# Altium PCB qav90.PcbDoc (part 2 of 3)
Units mm, origin at the board's own origin, x right, y up, seen from the top; angles counter-clockwise.
Board outline 90 x 90 mm, 3 copper layers (Top Layer, Mid-Layer 1, Bottom Layer); 94 components, 77 nets, 335 pads, 152 vias.
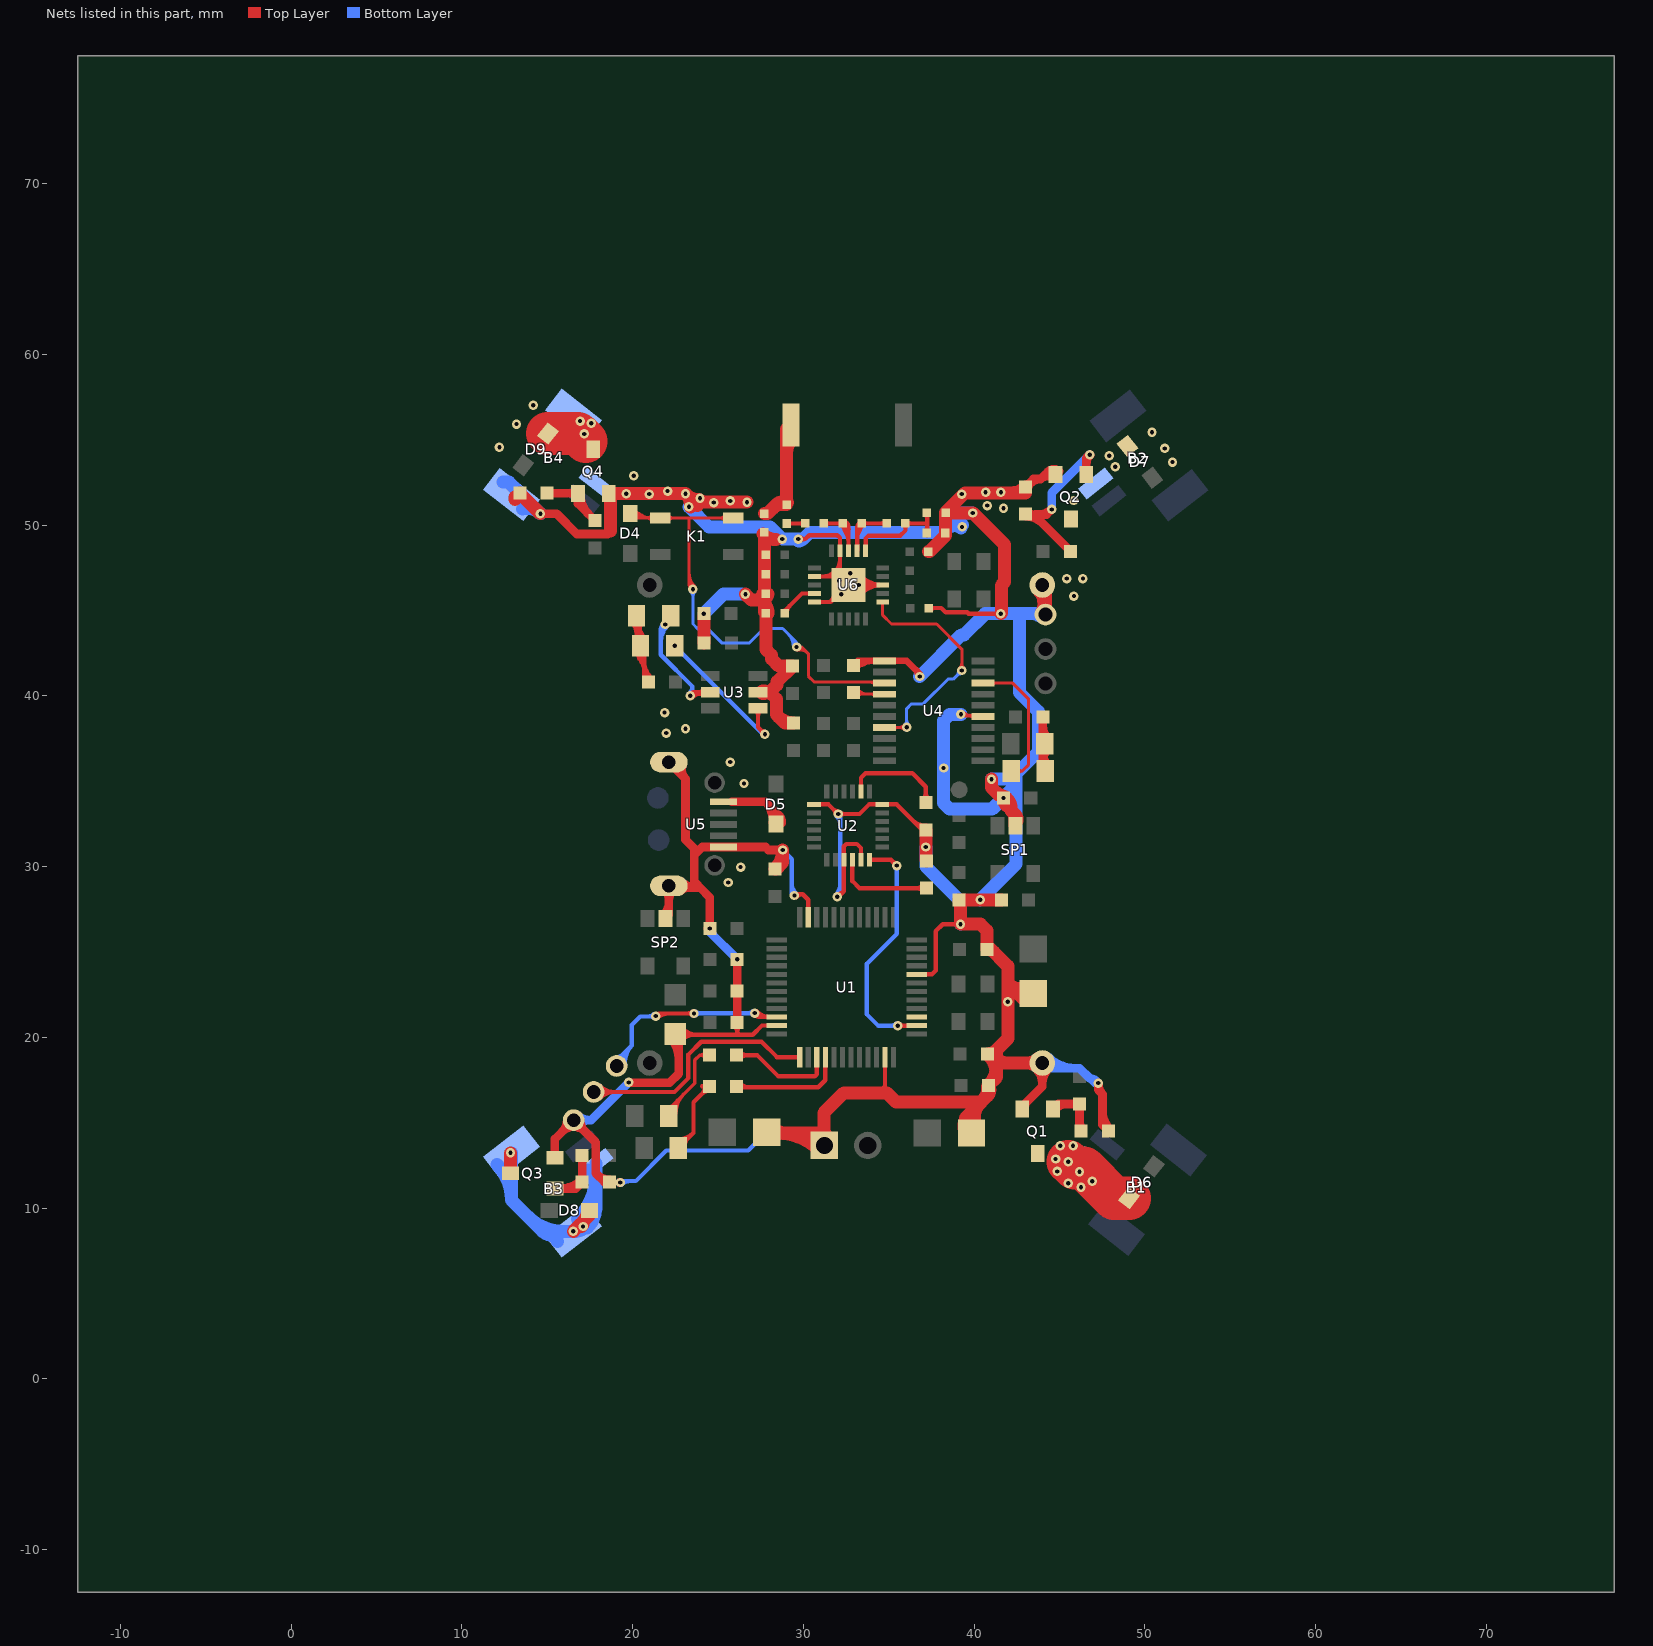
[diagram p2: the nets of this part, all layers, seen from the top]

## Via types
v1: diameter 0.55, hole 0.25, Top Layer to Bottom Layer, tented both sides, 152 vias

## Nets (pads, with @x,y where several pads share a name; then routed paths per layer and width w, separated by ;. In a path a pad name is that pad's centre, name@x,y a point inside that pad or via, vN(x,y) a via of type N, cw(c..) or ccw(c..) an arc to the next point about the centre after c; other vN are vias at no path point) (continued)
GND: B4.0@12.907,51.797 C1.1 C2.2 C3.1 C7.2 C8.1 C9.1 C10.2 C11.1 C12.2 C15.1 C16.1 C18.1 C19.2 C20.1 C22.1 C23.1 C24.1 C25.1 C26.1 C27.1 C28.1 C29.1 C130.2 C131.2 C132.2 C133.2 P1.1 pad.1 pad.2 Q1.2 Q2.2 Q3.2 Q4.2 R3.2 R5.1 R8.1 R17.2 R18.2 R19.1 R20.1 R21.1 R301.2 SP1.2 SP2.2 t4.1 t400.1 U1.8 U1.23 U1.35 U1.47 U2.1 U2.9 U2.11 U2.18 U3.2 U4.1 U4.15 U5.0@22.125,28.875 U5.0@22.125,36.125 U5.5 U6.0 U6.8 U6.14 U6.17 U6.20 | length 418.6
  Top Layer w0.178: v1(39.232,38.927) 39.334,38.826 40.488,38.826 U4.15@40.512,38.802 ; 39.764,38.869 ccw(c39.838,39.145) U4.15@39.981,38.898 ; 39.788,38.863 cw(c39.723,38.621) U4.15@39.941,38.746 ; v1@39.238,38.933 ccw(c39.498,39.193) 39.498,38.826 cw(c39.498,39.193) v1@39.238,38.933 ; v1@39.364,39.059 ccw(c39.927,39.622) 39.927,38.826 cw(c39.927,39.622) v1@39.364,39.059 ; 39.71,38.826 cw(c39.71,38.475) 39.958,38.723 ccw(c39.71,38.475) 39.71,38.826 ; 39.827,38.826 ccw(c39.827,39.011) 39.958,38.88 cw(c39.827,39.011) 39.827,38.826
  Top Layer w0.254: C131.2@22.5,20.2 22.543,20.157 22.697,20.157 27.04,20.157 27.579,20.696 U1.35@28.438,20.696 ; C131.2@22.68,20.38 ccw(c23.218,20.918) 23.218,20.157 ; C131.2@22.859,19.841 cw(c23.622,19.078) 23.622,20.157 ; C131.2@22.859,20.559 ccw(c23.831,21.531) 23.831,20.157 ; 23.85,28.875 23.95,28.775 ; C19.2@25.958,20.677 cw(c25.631,20.306) 26.126,20.306 ; C19.2@26.126,20.868 26.126,20.306 ; 26.2,20.232 26.126,20.306 ; C19.2@26.293,20.677 ccw(c26.62,20.306) 26.126,20.306 ; v1@29.592,28.215 cw(c29.961,27.903) 29.961,28.386 ; v1@29.682,28.386 29.961,28.386 ; v1(29.707,49.189) 30.114,49.189 30.342,49.418 31.993,49.418 32.15,49.261 U6.14@32.15,48.5 32.15,47 U6.0@32.65,46.5 U6.8@34.65,46.5 ; U1.23@30.288,27.046 30.288,28.059 29.961,28.386 ; U2.1@30.625,33.65 31.479,33.65 v1(32.044,33.085) 33.289,33.085 33.853,33.65 35.467,33.65 36.971,32.146 C2.2@37.175,32.146 ; U6.20@30.65,45.5 31.581,45.5 ; U6.17@30.65,47 U6.0@31.993,47 ; 31.134,47 ccw(c31.134,48.067) 31.889,47.312 ccw(c31.257,47.944) 32.15,47.944 ; v1@31.896,33.085 ccw(c31.539,33.085) 31.791,33.338 ccw(c32.044,33.591) v1@32.044,33.233 ; v1@31.993,28.382 ccw(c31.993,28.862) 32.333,28.523 ; U6.0@31.993,45.912 31.581,45.5 ; v1@32.019,28.209 32.375,28.565 32.375,31.191 32.517,31.333 33.136,31.333 33.375,31.094 U2.11@33.375,30.4 ; v1@32.149,32.981 cw(c32.401,32.728) 32.401,33.085 cw(c32.401,33.443) v1@32.149,33.19 ; U6.0@33.104,46.079 cw(c34.068,45.185) 34.068,46.5 cw(c34.068,47.815) U6.0@33.104,46.921 ; U6.0@33.29,45.906 cw(c34.65,44.646) U6.8@34.65,46.5 ; U6.0@33.29,47.094 ccw(c34.65,48.354) U6.8@34.65,46.5 ; 34.635,17.007 34.788,17.161 U1.47@34.788,18.846 ; 36.394,32.723 ccw(c37.175,33.504) C2.2@37.175,32.4 ; U1.8@36.638,23.696 37.539,23.696 37.759,23.916 37.759,26.227 38.165,26.634 v1(39.207,26.634) ; C29.1@37.353,45.15 38.085,45.15 38.334,44.901 39.596,44.901 39.677,44.82 v1(41.569,44.82) ; C29.1@37.44,45.063 cw(c37.65,44.853) 37.65,45.15 cw(c37.65,45.447) C29.1@37.44,45.237 ; 30.065,49.189 cw(c30.065,49.546) 29.812,49.294 ccw(c30.065,49.546) 30.065,49.189 ; 30.065,49.189 ccw(c30.065,48.832) 29.812,49.084 cw(c30.065,48.832) 30.065,49.189 ; 31.581,45.5 cw(c32.11,44.97) 32.36,45.677 ccw(c32.11,44.97) 31.581,45.5 ; 31.581,45.5 ccw(c30.988,46.092) 31.802,46.292 cw(c30.988,46.092) 31.581,45.5 ; 38.85,26.634 cw(c38.85,26.276) 39.102,26.529 ccw(c38.85,26.276) 38.85,26.634 ; 38.85,26.634 ccw(c38.85,26.991) 39.102,26.738 cw(c38.85,26.991) 38.85,26.634 ; 41.212,44.82 cw(c41.212,44.463) 41.464,44.716 ccw(c41.212,44.463) 41.212,44.82 ; 41.212,44.82 ccw(c41.212,45.177) 41.464,44.925 cw(c41.212,45.177) 41.212,44.82 ; U6.0@31.866,45.785 cw(c32.259,45.392) 32.444,45.916 ccw(c32.259,45.392) U6.0@31.866,45.785 ; U6.0@31.9,45.819 ccw(c31.501,46.218) 32.049,46.353 cw(c31.501,46.218) U6.0@31.9,45.819
  Top Layer w0.381: C16.1@32.933,41.798 33.187,42.052 U4.1@34.762,42.052 36.057,42.052 36.819,41.29 v1(36.819,41.137) ; C16.1@33.032,41.96 ccw(c33.307,42.409) 33.571,41.953 ; 36.637,41.503 ccw(c37.103,41.628) v1@36.861,41.21 ; C16.1@33.068,41.663 cw(c34.006,40.724) 34.006,42.052 ccw(c34.006,40.724) C16.1@33.068,41.663 ; 36.567,41.542 cw(c36.163,41.137) 36.735,41.137 ccw(c36.163,41.137) 36.567,41.542
  Top Layer w0.508: v1(14.6,50.675) 15.55,50.675 16.737,49.488 18.529,49.488 18.714,49.673 ; Q3.2@15.45,12.95 15.45,14.053 t400.1@16.55,15.153 17.837,13.866 17.837,12.038 18.35,11.525 R20.1@18.65,11.525 ; t400.1@16.169,15.153 cw(c15.249,15.153) 15.9,14.503 cw(c16.55,13.852) 16.55,14.772 cw(c16.55,13.852) 17.2,14.503 cw(c17.851,15.153) t400.1@16.931,15.153 ; 17.921,11.954 ccw(c18.65,12.683) R20.1@18.65,11.652 ; v1@19.25,11.5 v1(19.275,11.5) ; v1(19.776,17.363) 19.801,17.337 22.163,17.337 22.697,17.871 C131.2@22.697,20.157 ; SP2.2@21.822,27.178 ccw(c21.09,27.91) 22.125,27.91 ; U5.0@21.88,28.63 cw(c21.29,28.04) 22.125,28.04 cw(c22.96,28.04) U5.0@22.37,28.63 ; SP2.2@21.925,26.975 22.125,27.175 U5.0@22.125,28.875 22.225,28.775 23.95,28.775 24.526,28.199 v1(24.526,26.38) ; C131.2@22.231,19.931 cw(c21.105,18.805) 22.697,18.805 ; U5.0@22.412,35.837 23.1,35.15 ; U5.0@22.87,28.63 cw(c23.219,28.281) 23.219,28.775 ; U5.0@22.87,29.12 ccw(c23.702,29.952) 23.702,28.775 ; U5.0@22.942,35.986 ccw(c23.634,35.684) 23.1,35.15 ; 23.85,28.875 23.611,29.114 23.611,30.686 ; R8.1@24.395,26.38 v1(24.526,26.38) ; R8.1@24.504,26.38 v1(24.526,26.38) ; C19.2@26.126,20.868 C18.1@26.126,22.722 v1(26.126,24.576) ; v1(28.793,30.977) 27.955,30.977 27.782,31.15 U5.5@25.325,31.15 24.075,31.15 23.611,30.686 ; Q1.2@42.825,15.8 42.825,15.95 44,17.125 pad.2@44,18.131 ; Q1.2@42.971,15.9 cw(c43.444,15.9) Q1.2@43.11,16.235 ; R19.1@43.025,52.25 43.478,52.703 43.895,52.703 ; R19.1@43.142,52.201 cw(c43.895,51.889) 43.895,52.703 ; pad.2@43.649,18.149 cw(c42.803,17.303) 44,17.303 cw(c45.197,17.303) pad.2@44.351,18.149 ; 44.308,53.116 cw(c44.678,52.746) Q2.2@44.993,53.164 ; Q2.2@44.687,52.758 ccw(c44.323,52.276) 43.895,52.703 ; Q2.2@44.775,52.975 44.166,52.975 43.895,52.703 ; v1(47.275,17.325) 47.275,16.925 47.525,16.675 ; v1@47.296,17.323 ccw(c48.089,17.239) 47.525,16.675 ; 47.525,15.677 ccw(c49.027,15.677) R18.2@47.965,14.615 ; R18.2@47.875,14.525 47.525,14.875 47.525,16.675 ; 23.1,35.15 23.1,31.575 23.611,31.064 23.611,30.686
  Top Layer w0.762: R21.1@13.1,51.5 R21.1@13.1,51.65 ; R21.1@13.4,51.875 v1(14.6,50.675) ; 18.714,49.673 18.714,51.736 Q4.2@18.6,51.85 v1(23.1,51.85) ; v1@23.149,51.801 ccw(c23.95,52.601) v1@23.95,51.469 ; v1@23.406,51.071 ccw(c22.36,51.11) v1(23.1,51.85) ; 23.788,51.162 v1(23.1,51.85) ; v1@23.875,51.5 ccw(c24.237,51.862) 24.237,51.35 ; v1@24.1,51.35 v1(26.7,51.35) ; v1(24.17,44.82) 24.17,43.118 C3.1@24.195,43.093 ; v1(26.608,45.963) 26.964,45.608 27.496,45.608 ; C22.1@27.632,49.482 ccw(c28.402,50.252) 28.402,49.164 ; 27.725,49.164 27.725,45.379 ; C132.2@27.85,14.45 27.909,14.391 P1.1@30.519,14.391 ; C132.2@28.146,14.154 cw(c28.719,13.581) 28.719,14.391 ; C132.2@28.146,14.746 ccw(c29.004,15.604) 29.004,14.391 ; C132.2@28.495,14.391 cw(c28.495,10.935) P1.1@30.939,13.379 ; v1(28.793,30.977) 28.793,30.241 28.412,29.86 C8.1@28.336,29.86 ; 30.335,14.391 cw(c30.335,12.775) P1.1@31.478,13.918 ; P1.1@30.939,13.971 ccw(c30.294,14.616) 31.206,14.616 ; 31.206,14.757 ccw(c32.317,14.757) P1.1@31.531,13.971 ; P1.1@31.235,13.675 P1.1@30.519,14.391 ; C2.2@37.175,32.146 v1(37.175,31.155) 37.175,30.393 C9.1@37.226,30.342 ; C25.1@37.327,48.452 37.38,48.452 38.318,49.39 C24.1@38.318,49.545 38.331,49.557 C23.1@38.331,50.726 ; C133.2@39.496,14.419 39.496,15.289 40.375,16.169 ; 39.496,15.289 ccw(c39.975,15.289) C133.2@39.908,14.815 ; C133.2@39.56,14.216 cw(c40.43,14.768) 39.702,15.496 ; C133.2@39.57,14.712 ccw(c38.855,15.508) 39.924,15.451 ; C133.2@39.871,14.471 cw(c41.689,14.855) 40.375,16.169 ; 39.919,15.368 ccw(c40.87,15.317) C133.2@40.162,14.68 ; C133.2@40.204,14.624 cw(c41.254,15.29) 40.375,16.169 ; v1(41.025,35.125) 41.025,34.628 41.446,34.207 C15.1@41.569,34.207 ; 41.154,24.996 ccw(c40.756,24.597) C10.2@40.756,25.161 ; v1(41.569,44.82) 41.599,44.85 41.599,46.476 41.798,46.675 41.798,48.859 39.931,50.726 C23.1@38.331,50.726 ; C12.2@41.595,28.056 v1(40.363,28.056) C11.1@39.131,28.056 39.207,27.98 v1(39.207,26.634) 40.375,26.634 40.756,26.253 C10.2@40.756,25.161 ; 42.175,51.898 ccw(c42.175,53.1) R19.1@43.025,52.25 ; SP1.2@42.405,32.504 ccw(c41.581,32.69) 42.179,33.288 ; SP1.2@42.407,32.4 42.407,33.06 ; SP1.2@42.41,32.513 ccw(c42.132,32.785) 42.407,33.06 ; R19.1@43.025,51.898 39.473,51.898 38.331,50.756 C23.1@38.331,50.726 ; C130.2@43.292,22.952 cw(c42.79,23.989) 41.975,23.175 42.912,22.237 C130.2@43.575,22.9 ; t4.1@43.965,44.896 ccw(c43.134,45.376) 44.061,45.625 ; pad.2@44,18.5 41.321,18.5 ; v1(44.185,44.769) pad.1@44.185,46.315 ; 27.496,45.608 ccw(c27.496,46.051) 27.931,45.963 cw(c27.496,46.051) 27.496,45.608 ; 27.496,45.608 27.725,45.379 ; 27.725,45.379 cw(c27.221,44.875) 27.933,44.839 ccw(c27.221,44.875) 27.725,45.379 ; 27.725,45.379 cw(c28.084,45.738) 27.704,46.076 ccw(c28.084,45.738) 27.725,45.379 ; 27.725,45.379 27.725,44.923 C28.1@27.802,44.846 27.802,42.733 28.135,42.4 28.135,42.176 28.564,41.747 R301.2@29.377,41.747 28.463,40.832 28.463,40.655 28.031,40.223 28.431,39.822 28.431,38.908 28.92,38.419 R5.1@29.428,38.419 ; C8.1@28.336,29.86 ccw(c27.232,30.963) 28.793,30.963 cw(c27.232,30.963) C8.1@28.336,29.86 ; R5.1@29.428,38.419 cw(c29.428,39.646) 28.561,38.779 ccw(c29.428,39.646) R5.1@29.428,38.419 ; P1.1@30.519,14.391 31.206,14.391 31.206,15.585 32.374,16.753 34.889,16.753 35.42,16.222 40.322,16.222 40.375,16.169 ; 40.375,16.169 40.781,16.575 ; C10.2@40.756,25.161 40.873,25.277 41.975,24.175 v1(41.975,22.087) 41.975,19.928 41.321,19.273 41.321,18.5 ; 40.781,16.575 ccw(c40.446,16.91) C1.1@40.832,17.185 ; 40.781,16.575 ccw(c40.446,16.91) C1.1@40.832,17.185 ; 40.781,16.575 40.781,17.134 C1.1@40.832,17.185 ; R3.2@40.781,19.039 ccw(c42.083,20.341) 42.083,18.5 cw(c42.083,20.341) R3.2@40.781,19.039 ; R3.2@40.781,19.039 ccw(c40.781,19.776) 41.302,19.255 ; R3.2@40.781,19.039 ccw(c40.781,19.776) 41.302,19.255 ; R3.2@40.781,19.039 cw(c40.512,18.277) 41.321,18.277 ; R3.2@40.781,19.039 cw(c39.48,17.737) 41.321,17.737 ccw(c39.48,17.737) R3.2@40.781,19.039 ; R3.2@40.781,19.039 cw(c40.512,18.277) 41.321,18.277 ; R3.2@40.781,19.039 ccw(c40.781,19.776) 41.302,19.255 ; R3.2@40.781,19.039 ccw(c40.781,19.776) 41.302,19.255 ; R3.2@40.781,19.039 cw(c40.512,18.277) 41.321,18.277 ; R3.2@40.781,19.039 cw(c40.512,18.277) 41.321,18.277 ; C1.1@40.832,17.185 cw(c39.483,17.185) 40.437,16.231 ccw(c39.483,17.185) C1.1@40.832,17.185 ; C1.1@40.832,17.185 ccw(c39.654,18.364) 41.321,18.364 cw(c39.654,18.364) C1.1@40.832,17.185 ; C1.1@40.832,17.185 41.321,17.673 41.321,18.5 ; v1(41.721,34.025) ccw(c42.396,34.025) 41.919,33.548 cw(c42.396,34.025) v1(41.721,34.025) ; v1(41.721,34.025) cw(c41.493,33.379) 42.179,33.379 ; v1(41.721,34.025) 42.179,33.568 42.179,33.288 ; 42.179,33.288 42.407,33.06 ; 42.179,33.379 ccw(c41.302,33.379) 41.779,34.114 cw(c41.302,33.379) 42.179,33.379 ; 43.109,18.5 cw(c43.109,17.609) 43.739,18.239 ccw(c43.109,17.609) 43.109,18.5 ; 43.109,18.5 ccw(c43.109,19.391) 43.739,18.761 cw(c43.109,19.391) 43.109,18.5 ; 27.198,45.608 ccw(c27.198,46.593) 27.895,45.896 cw(c27.198,46.593) 27.198,45.608 ; U3.2@27.598,40.142 ccw(c27.598,40.991) 28.199,40.391 cw(c27.598,40.991) U3.2@27.598,40.142 ; U3.2@27.598,40.304 cw(c27.598,39.454) 28.199,40.055 ccw(c27.598,39.454) U3.2@27.598,40.304 ; 27.703,45.401 cw(c27.148,44.846) 27.933,44.846 ccw(c27.148,44.846) 27.703,45.401 ; pad.1@43.739,46.239 cw(c42.662,45.162) 44.185,45.162 ccw(c42.662,45.162) pad.1@43.739,46.239
  Bottom Layer w0.254: v1(19.275,11.5) 19.367,11.592 20.192,11.592 21.975,13.375 26.775,13.375 27.791,14.391 30.2,14.391 ; v1@19.38,11.395 cw(c19.855,10.92) 19.855,11.592 ; v1@28.793,30.829 cw(c28.793,30.472) 29.045,30.725 cw(c29.298,30.977) v1@28.941,30.977 ; v1(28.793,30.977) 29.326,30.444 v1@29.326,28.463 ; 29.326,29.035 ccw(c30.204,29.035) v1@29.583,28.415 ; v1@31.889,28.339 ccw(c31.207,29.021) 32.171,29.021 ; v1@31.939,32.981 cw(c31.38,32.421) 32.171,32.421 ; v1(32.044,33.085) 32.171,32.958 v1@32.171,28.412
  Bottom Layer w0.508: t400.1@16.55,15.153 17.566,15.153 v1(19.776,17.363) ; t400.1@16.819,14.884 cw(c17.47,14.233) 17.47,15.153 cw(c17.47,16.073) t400.1@16.819,15.422 ; v1(24.526,26.38) 24.526,26.177 v1(26.126,24.576) ; 30.2,14.391 30.916,13.675 P1.1@31.235,13.675 ; 30.2,14.391 ccw(c30.789,14.98) P1.1@31.058,14.192 ; P1.1@30.528,14.063 cw(c30.141,13.675) P1.1@30.689,13.675 ; pad.2@43.992,18.492 ccw(c44.695,19.195) 44.695,18.2 ; pad.2@44,18.5 44.3,18.2 46.175,18.2 46.799,17.576 ; pad.2@44.351,18.851 ccw(c45.922,20.422) 45.922,18.2 ; 46.933,17.488 ccw(c47.275,17.829) v1@47.275,17.346 ; v1@47.256,17.316 ccw(c46.844,17.121) 46.844,17.576 ; v1@47.257,17.314 ccw(c46.799,17.045) 46.799,17.576 ; v1(47.275,17.325) 47.096,17.325 46.844,17.576 ; 46.799,17.576 46.844,17.576 ; v1@24.547,26.38 ccw(c25.088,26.38) 24.705,25.997 cw(c25.088,26.38) v1@24.547,26.38
  Bottom Layer w0.762: B4.0@12.4,52.525 12.75,52.525 v1(14.6,50.675) ccw(c13.831,49.906) B4.0@13.562,50.96 ; v1(23.3,51.075) 24.479,49.896 28.061,49.896 v1(28.767,49.189) v1(29.707,49.189) 29.993,49.189 30.388,49.583 38.103,49.583 ; v1(24.17,44.82) 25.313,45.963 v1@26.405,45.963 ; v1(36.819,41.137) 39.258,43.576 39.41,43.576 40.655,44.82 v1(41.569,44.82) 42.915,44.82 ; v1(37.175,31.155) 37.175,30.012 39.207,27.98 v1(39.207,26.634) ; v1(39.232,38.927) 38.572,38.927 38.216,38.572 v1(38.216,35.778) 38.216,33.72 38.572,33.365 41.023,33.365 ; v1(39.918,50.713) 39.232,50.713 ; v1(40.363,28.056) 42.458,30.152 42.458,34.8 ; v1(41.025,35.125) 42.133,35.125 42.458,34.8 ; v1(41.721,34.025) 41.061,33.365 41.023,33.365 ; 43.449,44.82 cw(c43.449,44.034) t4.1@44.006,44.59 ; t4.1@43.776,44.723 ccw(c44.06,45.216) t4.1@44.214,44.667 ; v1(44.185,44.769) 44.134,44.82 42.915,44.82 ; 38.103,49.583 cw(c39.144,48.542) 39.312,50.005 ccw(c39.144,48.542) 38.103,49.583 ; 38.103,49.583 39.232,50.713 ; 39.232,50.713 ccw(c39.68,50.265) 39.224,49.827 cw(c39.68,50.265) 39.232,50.713 ; 41.023,33.365 42.458,34.8 ; 42.458,34.8 42.458,35.433 43.775,36.75 43.775,39.075 42.661,40.189 42.661,44.566 42.915,44.82 ; v1@29.707,49.083 ccw(c29.707,49.518) 30.015,49.21 cw(c29.707,49.518) v1@29.707,49.083
  other v1: 31.993,28.234 29.479,28.31 25.6,29.075 26.325,29.975 26.525,34.875 25.725,36.125 21.975,37.825 23.1,38.075 21.875,39.025 45.85,45.85 32.225,45.95 33.25,46.5 32.1,46.75 45.425,46.875 46.375,46.875 32.755,47.182 39.3,49.9 41.725,51 40.775,51.15 24.75,51.325 25.725,51.425 23.95,51.575 20.975,51.825 39.275,51.825 19.625,51.85 40.675,51.925 41.575,51.925 22.05,52 20.075,52.9 51.625,53.7 51.175,54.5 12.2,54.575 50.425,55.45 13.2,55.925 14.175,57.025
HMC-INT: U1.3
IRQ: U4.7 U6.6 | length 20.8
  Top Layer w0.178: U6.6@34.65,45.5 34.65,44.729 35.168,44.211 37.808,44.211 39.283,42.735 v1(39.283,41.493) ; U4.7@34.773,38.14 U4.7@34.762,38.152 35.893,38.152 v1@36.057,37.988 ; 35.505,38.152 cw(c35.505,38.42) 35.315,38.23 ccw(c35.505,38.42) 35.505,38.152 ; 35.505,38.152 ccw(c35.505,37.883) 35.315,38.073 cw(c35.505,37.883) 35.505,38.152 ; 39.283,41.942 cw(c38.834,41.942) 39.151,41.624 ccw(c38.834,41.942) 39.283,41.942 ; 39.283,41.942 ccw(c39.732,41.942) 39.415,41.624 cw(c39.732,41.942) 39.283,41.942 ; 35.575,38.152 ccw(c35.575,38.648) 35.926,38.297 cw(c35.575,38.648) 35.575,38.152 ; 35.641,38.152 cw(c35.641,37.749) 35.926,38.034 ccw(c35.641,37.749) 35.641,38.152
  Bottom Layer w0.178: v1@36.057,37.988 36.057,39.258 36.337,39.537 37.022,39.537 38.47,40.985 38.775,40.985 v1(39.283,41.493) ; 36.057,38.615 cw(c35.608,38.615) 35.926,38.297 ccw(c35.608,38.615) 36.057,38.615 ; 36.057,38.615 ccw(c36.506,38.615) 36.189,38.297 cw(c36.506,38.615) 36.057,38.615 ; 38.965,41.175 cw(c39.283,40.857) 39.283,41.307 ccw(c39.283,40.857) 38.965,41.175 ; 38.965,41.175 ccw(c38.648,41.493) 39.097,41.493 cw(c38.648,41.493) 38.965,41.175
  other v1: 36.057,38.165
JTCK: t100.1 U1.37 | length 18.3
  Top Layer w0.254: t100.1@17.718,16.804 22.454,16.804 23.268,17.618 23.268,19.001 24.018,19.75 27.548,19.75 28.453,18.846 U1.37@29.788,18.846 ; 18.945,16.804 cw(c18.945,18.03) 18.078,17.163 ccw(c18.945,18.03) 18.945,16.804 ; 18.945,16.804 ccw(c18.945,15.578) 18.078,16.445 cw(c18.945,15.578) 18.945,16.804
JTMS: t200.1 U1.34 | length 19.4
  Top Layer w0.254: v1(21.35,21.25) 21.5,21.4 22.896,21.4 ; v1@21.455,21.145 cw(c22.069,20.531) 22.069,21.4 ; 22.897,21.401 23.599,21.401 v1(23.6,21.4) ; 23.239,21.401 cw(c23.239,21.039) v1@23.495,21.295 ; 23.246,21.401 ccw(c23.246,21.754) v1@23.495,21.505 ; v1@27.075,21.35 ccw(c27.447,21.722) 27.447,21.196 ; v1(27.15,21.425) 27.379,21.196 ; v1@27.161,21.277 cw(c27.181,20.997) 27.379,21.196 ; v1@27.255,21.53 ccw(c28.061,22.336) U1.34@28.061,21.196 ; v1@27.298,21.414 ccw(c27.578,21.394) 27.379,21.196 ; U1.34@28.438,21.196 27.379,21.196
  Bottom Layer w0.254: t200.1@18.963,18.531 19.954,19.522 ; t200.1@19.065,18.836 ccw(c19.065,19.327) 19.411,18.98 ; t200.1@19.213,18.43 cw(c20.06,18.43) 19.461,19.029 ; t200.1@19.317,18.36 cw(c20.262,18.482) 19.588,19.156 ; t200.1@19.568,18.393 cw(c20.91,18.565) 19.954,19.522 ; 20.932,21.225 ccw(c20.932,21.668) v1@21.245,21.355 ; 21.053,21.225 cw(c21.053,20.953) v1@21.245,21.145 ; v1@21.35,21.225 20.454,21.225 19.954,20.725 19.954,19.522 ; v1(23.6,21.4) 23.575,21.425 v1(27.15,21.425) ; v1@23.705,21.295 cw(c24.018,20.982) 24.018,21.425 ; v1@23.705,21.505 ccw(c23.897,21.697) 23.897,21.425 ; v1@27.045,21.32 ccw(c26.793,21.068) 26.793,21.425 ccw(c26.793,21.782) v1@27.045,21.53
KEY2: D4.1 K1.1 U4.3 | length 41.8
  Top Layer w0.178: D4.1@19.827,50.629 cw(c20.111,50.463) D4.1@20.276,50.748 ; D4.1@19.832,50.593 ccw(c20.236,50.998) D4.1@20.236,50.426 ; D4.1@19.857,50.593 ccw(c20.261,50.998) D4.1@20.261,50.426 ; D4.1@19.877,50.699 20.151,50.426 K1.1@21.609,50.426 K1.1@25.909,50.426 ; D4.1@19.957,50.719 ccw(c20.666,51.427) 20.666,50.426 ; D4.1@19.98,50.539 cw(c20.266,50.372) 20.431,50.658 ; D4.1@19.982,50.719 ccw(c20.691,51.427) 20.691,50.426 ; D4.1@20.083,50.845 ccw(c21.095,51.857) K1.1@21.095,50.426 ; D4.1@20.108,50.845 ccw(c21.12,51.857) K1.1@21.12,50.426 ; D4.1@20.132,50.447 cw(c20.272,50.364) 20.354,50.505 ; D4.1@20.134,50.449 cw(c20.42,50.282) 20.586,50.569 ; D4.1@20.167,50.699 ccw(c20.414,50.765) D4.1@20.286,50.543 ; K1.1@21.167,50.259 ccw(c20.764,49.856) 20.764,50.426 ccw(c20.764,50.996) K1.1@21.167,50.593 ; K1.1@22.051,50.259 cw(c22.454,49.856) 22.454,50.426 cw(c22.454,50.996) K1.1@22.051,50.593 ; 23.306,46.815 ccw(c24.107,46.815) v1@23.541,46.248 ; 23.306,47.244 ccw(c24.536,47.244) v1@23.667,46.374 ; 23.306,50.419 23.306,46.471 ; v1@23.355,46.29 ccw(c23.174,46.338) 23.306,46.471 ; v1@23.487,46.422 cw(c23.439,46.604) 23.306,46.471 ; v1(23.535,46.243) 23.306,46.471 ; K1.1@25.467,50.259 ccw(c25.064,49.856) 25.064,50.426 ccw(c25.064,50.996) K1.1@25.467,50.593 ; v1@29.607,42.856 cw(c29.703,42.367) 30.055,42.72 ; v1@29.641,42.682 cw(c29.78,41.972) 30.291,42.483 ; 29.91,42.864 30.291,42.483 ; 33.854,40.82 cw(c33.854,40.318) U4.3@34.208,40.673 ; U4.3@34.762,40.752 34.694,40.82 30.634,40.82 30.291,41.163 30.291,42.483
  Bottom Layer w0.178: v1@23.403,46.111 cw(c23.086,45.793) 23.535,45.793 cw(c23.984,45.793) v1@23.667,46.111 ; v1(23.535,46.243) 23.535,44.22 23.85,43.906 24.424,43.906 25.219,43.111 26.845,43.111 27.691,43.957 28.793,43.957 29.606,43.144 ; 29.09,43.659 cw(c28.296,42.864) v1@29.42,42.864 ; 29.394,43.356 cw(c28.903,42.864) v1@29.597,42.864 ; v1@29.534,43.036 ccw(c29.489,43.144) 29.606,43.144 ; v1(29.606,42.864) 29.606,43.144 ; v1@29.677,43.036 cw(c29.722,43.144) 29.606,43.144
LED6: R11.2 U1.40 | length 8.7
  Top Layer w0.254: R11.2@26.1,17.134 26.151,17.083 30.876,17.083 31.288,17.496 U1.40@31.288,18.846 ; R11.2@26.28,16.955 cw(c26.591,16.644) 26.591,17.083 ccw(c26.591,16.644) R11.2@26.28,16.955 ; R11.2@26.28,17.314 ccw(c26.836,17.87) 26.836,17.083 cw(c26.836,17.87) R11.2@26.28,17.314
LED7: R16.2 U1.39 | length 8.2
  Top Layer w0.254: R16.2@26.1,18.963 27.294,18.963 28.539,17.718 30.672,17.718 30.788,17.834 U1.39@30.788,18.846 ; 26.713,18.963 cw(c26.713,19.576) 26.28,19.143 ccw(c26.713,19.576) 26.713,18.963 ; 26.713,18.963 ccw(c26.713,18.35) 26.28,18.783 cw(c26.713,18.35) 26.713,18.963
LOWPOWER: D31.2 U4.18 | length 9.6
  Top Layer w0.178: U4.18@40.512,40.752 42.259,40.752 43.2,39.811 43.2,35.975 42.825,35.6 ; D31.2@42.175,35.6 42.825,35.6 ; D31.2@42.557,35.427 cw(c42.825,35.306) 42.825,35.6 ; D31.2@42.557,35.773 ccw(c42.825,35.894) 42.825,35.6 ; 41.255,40.752 cw(c41.255,41.02) 41.065,40.83 ccw(c41.255,41.02) 41.255,40.752 ; 41.255,40.752 ccw(c41.255,40.483) 41.065,40.673 cw(c41.255,40.483) 41.255,40.752
MPU-INT: U1.2 U2.12 | length 18.9
  Top Layer w0.254: U2.12@33.875,30.4 35.136,30.4 v1(35.473,30.063) ; v1(35.524,20.69) 36.633,20.69 U1.2@36.638,20.696 ; 35.22,30.315 cw(c34.968,30.063) 35.325,30.063 ccw(c34.968,30.063) 35.22,30.315 ; 35.22,30.315 ccw(c35.473,30.568) 35.473,30.211 cw(c35.473,30.568) 35.22,30.315 ; 35.881,20.69 cw(c35.881,21.047) 35.628,20.795 ccw(c35.881,21.047) 35.881,20.69 ; 35.881,20.69 ccw(c35.881,20.333) 35.628,20.586 cw(c35.881,20.333) 35.881,20.69
  Bottom Layer w0.254: v1(35.473,30.063) 35.473,26.063 33.722,24.312 33.722,21.349 34.381,20.69 v1(35.524,20.69) ; 35.167,20.69 cw(c35.167,20.333) 35.419,20.586 ccw(c35.167,20.333) 35.167,20.69 ; 35.167,20.69 ccw(c35.167,21.047) 35.419,20.795 cw(c35.167,21.047) 35.167,20.69 ; 35.473,29.705 cw(c35.83,29.705) 35.578,29.958 ccw(c35.83,29.705) 35.473,29.705 ; 35.473,29.705 ccw(c35.116,29.705) 35.368,29.958 cw(c35.116,29.705) 35.473,29.705
NetB1_1: B1.1 D6.1 Q1.3 | length 4.5
  Top Layer w2.54: v1(45.523,12.722) 45.895,12.35 46.433,12.35 48.203,10.58 D6.1@49.093,10.58
  other v1: 46.263,11.231 45.525,11.45 46.925,11.575 46.175,12.125 44.875,12.15 44.775,12.875 45.05,13.65 45.8,13.65
NetB2_2: B2.2 D7.1 Q2.3
  other v1: 45.85,51.45 48.275,53.425 47.925,54.075
NetB3_2: B3.0 B3.2 D8.1 Q3.3 | length 31.2
  Top Layer w0.762: Q3.3@12.85,12.05 v1(12.85,13.244) ; v1(16.532,8.644) 17.48,9.592 D8.1@17.48,9.875 ; 16.791,8.903 cw(c17.1,8.594) v1@17.1,9.031 ; v1@16.994,8.925 cw(c17.431,8.925) 17.122,9.234 ; v1@17.077,9.189 ccw(c16.39,9.875) D8.1@17.361,9.875 ; 17.094,9.206 ccw(c16.451,9.85) D8.1@17.361,9.85
  Bottom Layer w0.762: B3.0@12.052,12.566 cw(c10.005,10.519) 12.9,10.519 ; B3.0@12.9,13.244 12.9,10.475 14.731,8.644 ; 13.868,9.507 ccw(c15.98,11.619) B3.0@15.98,8.632 ; B3.0@15.591,8.059 ccw(c14.731,7.72) 14.731,8.644 ; B3.0@15.74,8.556 cw(c15.288,9.2) 14.731,8.644 ; B3.0@16.787,9.371 ccw(c14.234,11.925) 17.845,11.925 ; B3.0@16.791,8.903 cw(c17.1,8.594) B3.0@17.1,9.031 ; B3.0@16.994,8.925 cw(c17.431,8.925) B3.0@17.122,9.234 ; B3.0@17.127,8.823 ccw(c16.98,9.374) B3.0@17.474,9.089 ; B3.0@17.326,8.832 ccw(c16.073,10.085) 17.845,10.085 ; B3.2@17.359,12.225 cw(c16.185,11.051) 17.845,11.051 ; B3.2@17.845,12.608 17.845,9.957 v1(16.532,8.644) 14.731,8.644 ; B3.0@16.677,8.644 ccw(c16.677,9.348) 17.175,8.85 cw(c16.677,9.348) B3.0@16.677,8.644
  other v1: 17.1,8.925
NetB4_1: B4.0@16.539,56.446 B4.1 D9.1 Q4.3 | length 2.4
  Top Layer w2.54: D9.1@15.036,55.375 16.8,55.375 17.25,54.925
  other v1: 17.175,55.35 17.575,55.975 16.925,56.1
NetC2_1: C2.1 U2.20 | length 7.9
  Top Layer w0.254: U2.20@33.375,34.4 33.375,35.204 33.644,35.473 36.387,35.473 37.175,34.686 C2.1@37.175,33.746 ; 37.175,34.359 cw(c36.562,34.359) 36.995,33.925 ccw(c36.562,34.359) 37.175,34.359 ; 37.175,34.359 ccw(c37.788,34.359) 37.354,33.925 cw(c37.788,34.359) 37.175,34.359
NetC9_2: C9.2 U2.10 | length 7.7
  Top Layer w0.254: U2.10@32.875,30.4 32.875,29.156 33.288,28.742 C9.2@37.226,28.742 ; 36.612,28.742 cw(c36.612,28.129) 37.046,28.563 ccw(c36.612,28.129) 36.612,28.742 ; 36.612,28.742 ccw(c36.612,29.355) 37.046,28.922 cw(c36.612,29.355) 36.612,28.742
NetC16_2: C16.2 U4.4 | length 5.9
  Top Layer w0.178: C16.2@32.882,40.198 C16.2@32.933,40.198 33.029,40.102 U4.4@34.762,40.102 ; 34.019,40.102 cw(c34.019,39.833) 34.208,40.023 ccw(c34.019,39.833) 34.019,40.102 ; 34.019,40.102 ccw(c34.019,40.37) 34.208,40.18 cw(c34.019,40.37) 34.019,40.102 ; C16.2@33.014,40.278 ccw(c33.441,40.705) 33.441,40.102 cw(c33.441,40.705) C16.2@33.014,40.278 ; C16.2@33.14,39.991 cw(c33.406,39.724) 33.406,40.102 ccw(c33.406,39.724) C16.2@33.14,39.991 ; C16.2@33.14,40.404 ccw(c33.87,41.135) 33.87,40.102 cw(c33.87,41.135) C16.2@33.14,40.404
NetC21_1: C21.1 L1.2 | length 2.9
  Top Layer w0.254: C21.1@29.025,50.1 L1.2@30.106,50.1 ; 29.322,50.1 cw(c29.322,50.397) 29.112,50.187 ccw(c29.322,50.397) 29.322,50.1 ; 29.322,50.1 ccw(c29.322,49.803) 29.112,50.013 cw(c29.322,49.803) 29.322,50.1 ; 29.801,50.1 ccw(c29.801,50.409) 30.019,50.19 cw(c29.801,50.409) 29.801,50.1 ; 29.817,50.1 cw(c29.817,49.815) 30.019,50.016 ccw(c29.817,49.815) 29.817,50.1
NetC21_2: C21.2 C22.2 E1.1 | length 11.1
  Top Layer w0.762: C22.2@27.725,50.675 27.891,50.675 28.416,51.2 ; 29.025,54.234 cw(c30.166,54.234) E1.1@29.359,55.041 ; 29.025,54.376 cw(c29.924,54.376) E1.1@29.288,55.012 ; E1.1@29.275,55.875 29.025,55.625 C21.2@29.025,51.2 28.416,51.2 ; 28.416,51.2 cw(c28.833,50.783) 29.08,51.319 ccw(c28.833,50.783) 28.416,51.2 ; 28.209,50.993 cw(c29.025,50.177) 29.025,51.331 ccw(c29.025,50.177) 28.209,50.993
NetC23_2: C23.2 C24.2 L3.1 U6.11 | length 9.3
  Top Layer w0.254: U6.11@33.65,48.5 33.65,49.22 33.822,49.392 35.676,49.392 35.981,49.697 L3.1@35.981,50.103 37.226,50.103 37.251,50.078 ; C24.2@37.251,49.4 37.251,50.078 ; C23.2@37.251,50.675 37.251,50.078 ; 35.981,49.806 cw(c36.278,49.806) L3.1@36.068,50.016 ; 35.981,49.806 ccw(c35.684,49.806) 35.894,50.016 cw(c35.684,49.806) 35.981,49.806 ; 35.981,49.806 cw(c36.278,49.806) L3.1@36.068,50.016 ; L3.1@36.068,50.016 cw(c36.278,49.806) 36.278,50.103 ; L3.1@36.068,50.016 cw(c36.278,49.806) 36.278,50.103 ; 36.278,50.103 cw(c36.278,50.4) 36.068,50.19 ccw(c36.278,50.4) 36.278,50.103 ; C24.2@37.131,49.632 ccw(c36.841,49.922) 37.251,49.922 cw(c36.841,49.922) C24.2@37.131,49.632 ; C23.2@37.144,50.639 cw(c36.885,50.38) 37.251,50.38 ccw(c36.885,50.38) C23.2@37.144,50.639
NetC28_2: C28.2 U6.19 | length 3.2
  Top Layer w0.254: C28.2@28.902,44.998 28.92,44.998 29.922,46 U6.19@30.65,46 U6.19@30.642,45.992 ; C28.2@29.025,44.846 cw(c29.648,44.846) 29.207,45.286 ccw(c29.648,44.846) C28.2@29.025,44.846
NetD1_1: D1.1 D2.1 R4.1 | length 26.4
  Top Layer w0.25: 20.233,43.941 ccw(c21.335,43.941) D1.1@20.556,43.162 ; 20.233,43.941 ccw(c21.335,43.941) D1.1@20.556,43.162 ; D2.1@20.233,44.693 20.233,43.169 D1.1@20.462,42.941 20.69,42.712 20.69,41.036 R4.1@20.919,40.807 ; D1.1@20.258,43.392 ccw(c20.18,43.517) 20.308,43.591 ccw(c20.565,43.74) D1.1@20.52,43.446 ; D1.1@20.263,43.395 ccw(c20.064,43.725) 20.398,43.918 ; D1.1@20.393,43.181 ccw(c20.196,43.507) 20.525,43.697 ; 20.398,42.184 cw(c20.727,42.374) D1.1@20.53,42.7 ; D1.1@20.403,42.435 cw(c20.358,42.141) 20.616,42.29 cw(c20.744,42.364) D1.1@20.665,42.489 ; 20.525,41.963 cw(c20.859,42.156) D1.1@20.66,42.486 ; R4.1@20.74,40.99 ccw(c20.452,41.285) 20.809,41.491 ; R4.1@20.915,40.811 ccw(c20.684,41.048) 20.97,41.213 ; 20.233,43.641 cw(c21.158,43.641) 20.504,44.295 ccw(c21.158,43.642) 20.233,43.642 ; 20.233,43.642 ccw(c19.308,43.642) 19.962,44.295 cw(c19.308,43.642) 20.233,43.642 ; 20.459,43.701 cw(c21.27,43.918) 20.558,44.363 ccw(c21.27,43.918) 20.459,43.701 ; 20.459,43.701 ccw(c19.624,43.477) 20.046,44.232 cw(c19.623,43.477) 20.459,43.701 ; D1.1@20.191,42.543 cw(c18.985,41.337) 20.69,41.337 ccw(c18.985,41.337) D1.1@20.191,42.543 ; D2.1@20.233,44.544 ccw(c21.938,44.544) 20.732,43.338 cw(c21.938,44.544) D2.1@20.233,44.544 ; D1.1@20.368,42.72 cw(c19.589,41.941) 20.69,41.941 ccw(c19.589,41.941) D1.1@20.368,42.72 ; 20.69,41.373 ccw(c21.485,41.373) 20.923,40.811 cw(c21.485,41.373) 20.69,41.373 ; 20.69,41.977 ccw(c22.089,41.977) 21.1,40.988 cw(c22.089,41.977) 20.69,41.977
NetD1_2: D1.2 U3.1 | length 13.7
  Top Layer w0.25: U3.1@27.348,39.273 27.348,38.162 v1(27.751,37.759) ; 27.348,38.85 cw(c27.77,38.85) 27.472,39.149 ccw(c27.77,38.85) 27.348,38.85 ; 27.348,38.85 ccw(c26.925,38.85) 27.224,39.149 cw(c26.925,38.85) 27.348,38.85 ; 27.495,38.015 cw(c27.239,37.759) 27.601,37.759 ccw(c27.239,37.759) 27.495,38.015 ; 27.495,38.015 ccw(c27.751,38.271) 27.751,37.909 cw(c27.751,38.271) 27.495,38.015
  Bottom Layer w0.25: v1(22.462,42.941) 27.643,37.759 v1(27.751,37.759) ; 22.718,42.685 cw(c22.974,42.941) 22.612,42.941 ccw(c22.974,42.941) 22.718,42.685 ; 22.718,42.685 ccw(c22.462,42.428) 22.462,42.791 cw(c22.462,42.428) 22.718,42.685 ; 27.311,38.092 ccw(c27.751,38.532) 27.751,37.909 cw(c27.751,38.532) 27.311,38.092
NetD2_2: D2.2 U3.5 | length 16.3
  Top Layer w0.254: v1(23.383,40.02) 23.586,40.223 ; v1@23.458,40.147 ccw(c23.674,40.515) 23.887,40.146 ; 23.849,40.121 cw(c23.973,39.66) U3.5@24.211,40.073 ; 23.931,40.142 ccw(c23.838,40.488) U3.5@24.148,40.309 ; U3.5@24.548,40.223 23.586,40.223 ; 23.586,40.223 cw(c23.441,40.368) 23.407,40.166 ccw(c23.441,40.368) 23.586,40.223 ; 23.586,40.223 ccw(c23.731,40.078) 23.529,40.044 cw(c23.731,40.078) 23.586,40.223 ; 23.88,40.223 cw(c23.88,39.805) 24.176,40.1 ccw(c23.88,39.805) 23.88,40.223 ; 23.88,40.223 ccw(c23.88,40.64) 24.176,40.345 cw(c23.88,40.64) 23.88,40.223 ; v1@23.308,40.095 cw(c23.617,39.785) 23.617,40.223 ccw(c23.617,39.785) v1@23.308,40.095 ; v1@23.487,39.915 cw(c24.231,39.172) 24.231,40.223 ccw(c24.231,39.172) v1@23.487,39.915
  Bottom Layer w0.254: 21.738,43.603 ccw(c21.223,43.901) v1@21.773,44.128 ; v1(21.909,44.185) 21.655,43.931 21.655,42.407 23.51,40.553 ; v1(23.383,40.02) 23.51,40.147 23.51,40.553 ; 23.51,40.553 cw(c23.003,40.553) 23.297,40.14 ccw(c23.003,40.553) 23.51,40.553 ; 21.655,43.215 cw(c22.88,43.215) 22.014,44.081 ccw(c22.88,43.215) 21.655,43.215 ; 21.655,43.828 cw(c22.267,43.828) 21.834,44.26 ccw(c22.267,43.828) 21.655,43.828
NetD3_1: D3.1 D31.1 R90.2 | length 6.2
  Top Layer w0.508: D31.1@44.025,36.158 cw(c45.065,36.158) D3.1@44.33,36.893 ; D3.1@44.025,36.702 ccw(c45.15,36.702) D31.1@44.355,35.907 ; 44.025,38.242 ccw(c45.065,38.242) D3.1@44.33,37.507 ; R90.2@44.025,38.775 44.025,35.75 D31.1@44.175,35.6 ; 44.079,36.502 cw(c44.352,36.575) D3.1@44.246,36.838
NetD5_1: D5.1 U5.1 | length 7.9
  Top Layer w0.508: U5.1@25.8,33.8 27.786,33.8 ; 28.092,33.355 ccw(c29.081,33.528) D5.1@28.504,32.706 ; D5.1@28.226,32.589 ccw(c26.709,32.723) 27.786,33.8 ; D5.1@28.251,32.584 ccw(c26.658,32.672) 27.786,33.8 ; D5.1@28.386,32.49 28.386,33.2 27.786,33.8 ; 28.386,33.024 ccw(c28.86,33.024) D5.1@28.525,32.688 ; 28.555,33.031 cw(c28.122,32.598) D5.1@28.732,32.544
NetD10_2: D10.2 R11.1 | length 8.3
  Top Layer w0.25: D10.2@22.675,13.525 23.566,14.416 23.566,16.2 R11.1@24.5,17.134 24.059,17.134 ; D10.2@22.675,13.785 ccw(c22.675,14.413) D10.2@23.119,13.969 ; D10.2@22.675,14.035 ccw(c22.675,15.266) 23.546,14.396 ; D10.2@23.058,13.652 cw(c23.676,13.652) 23.239,14.089 ; R11.1@24.244,17.134 cw(c23.626,17.134) 24.063,16.697 cw(c24.5,16.26) R11.1@24.5,16.878 ; R11.1@24.278,17.007 ccw(c24.059,16.882) 24.059,17.134 ; R11.1@24.278,17.261 cw(c24.059,17.386) 24.059,17.134
NetD11_2: D11.2 R16.1 | length 8.1
  Top Layer w0.203: D11.2@22.125,15.4 22.125,15.8 23.649,17.324 23.649,18.674 23.938,18.963 ; D11.2@22.125,15.933 ccw(c22.125,16.255) D11.2@22.353,16.028 ; D11.2@22.328,15.527 cw(c23.478,15.527) 22.665,16.34 ; D11.2@22.531,15.527 cw(c24.172,15.527) 23.012,16.687 ; R16.1@24.277,18.794 ccw(c23.938,18.537) 23.938,18.963 ; R16.1@24.277,19.132 cw(c23.938,19.389) 23.938,18.963 ; R16.1@24.5,18.963 23.938,18.963
NetL1_1: L1.1 L2.2 U6.13 | length 12.1
  Top Layer w0.254: L1.1@31.4,50.1 32.316,50.1 32.65,49.766 U6.13@32.65,48.5 ; L2.2@32.308,49.981 cw(c32.279,49.544) 32.658,49.763 ; L2.2@32.434,50.072 ccw(c33.113,49.89) 32.505,49.538 ; L2.2@32.229,50.016 cw(c31.211,48.999) 32.65,48.999 ccw(c31.211,48.999) L2.2@32.229,50.016 ; L2.2@32.229,50.016 ccw(c32.027,49.815) 32.027,50.1 cw(c32.027,49.815) L2.2@32.229,50.016 ; L1.1@31.293,50.016 cw(c31.495,49.815) 31.495,50.1 ccw(c31.495,49.815) L1.1@31.293,50.016 ; L1.1@31.293,50.19 ccw(c31.511,50.409) 31.511,50.1 cw(c31.511,50.409) L1.1@31.293,50.19 ; 32.01,50.1 ccw(c32.01,50.409) 32.229,50.19 cw(c32.01,50.409) 32.01,50.1 ; L2.2@32.311,49.98 cw(c32.297,49.628) 32.65,49.628 ccw(c32.297,49.628) L2.2@32.311,49.98 ; L2.2@32.316,49.98 cw(c32.316,49.692) 32.52,49.896 ccw(c32.316,49.692) L2.2@32.316,49.98 ; L2.2@32.321,50.234 cw(c32.307,49.892) 32.65,49.892 ccw(c32.307,49.892) L2.2@32.321,50.234 ; L2.2@32.408,50.196 cw(c31.825,49.612) 32.65,49.612 ccw(c31.825,49.612) L2.2@32.408,50.196 ; L2.2@32.439,50.103 ccw(c32.744,50.103) 32.528,49.888 cw(c32.744,50.103) L2.2@32.439,50.103
NetL2_1: L2.1 L3.2 U6.12 | length 9.3
  Top Layer w0.254: U6.12@33.15,48.5 33.15,49.838 L2.1@33.416,50.103 L3.2@34.881,50.103 ; 33.227,49.538 ccw(c32.618,49.89) L2.1@33.297,50.072 ; L2.1@33.206,49.893 cw(c33.416,49.683) 33.416,49.98 ccw(c33.416,49.683) L2.1@33.206,49.893 ; L2.1@33.206,49.893 ccw(c32.996,50.103) 33.293,50.103 cw(c32.996,50.103) L2.1@33.206,49.893 ; L2.1@33.503,50.016 cw(c33.713,49.806) 33.713,50.103 ; L2.1@33.503,50.016 ccw(c34.354,49.165) 33.15,49.165 cw(c34.354,49.165) L2.1@33.503,50.016 ; L2.1@33.503,50.016 cw(c33.713,49.806) 33.713,50.103 ; 33.713,50.103 cw(c33.713,50.4) 33.503,50.19 ccw(c33.713,50.4) 33.713,50.103 ; 34.584,50.103 cw(c34.584,49.806) 34.794,50.016 ccw(c34.584,49.806) 34.584,50.103 ; 34.584,50.103 ccw(c34.584,50.4) 34.794,50.19 cw(c34.584,50.4) 34.584,50.103 ; 33.15,49.778 cw(c33.741,49.778) 33.323,50.196 ccw(c33.741,49.778) 33.15,49.778
NetQ1_1: Q1.1 R12.1 R18.1 | length 4.5
  Top Layer w0.508: Q1.1@44.625,15.8 44.925,16.1 R12.1@46.175,16.1 R18.1@46.175,14.625 ; Q1.1@44.728,15.797 cw(c45.46,15.065) 45.46,16.1 ; 46.175,15.073 ccw(c46.823,15.073) R18.1@46.365,14.615
NetQ2_1: Q2.1 R13.1 R19.2 | length 12.8
  Top Layer w0.508: R19.2@43.025,50.523 cw(c43.025,49.13) 44.01,50.115 ; R19.2@43.105,50.551 cw(c43.338,50.263) 43.6,50.525 ; 43.775,50.625 ccw(c43.775,51.7) v1@44.535,50.94 ; v1(44.55,50.925) 44.25,50.625 43.6,50.625 43.6,50.525 ; R13.1@45.65,48.475 43.6,50.525 ; Q2.1@46.575,52.975 46.575,53.925 v1(46.775,54.125) ; 46.575,53.591 cw(c47.309,53.591) v1@46.79,54.11 ; 46.575,53.842 cw(c46.845,53.842) v1@46.78,54.105
  Bottom Layer w0.508: v1(44.55,50.925) 44.55,51.9 v1(46.775,54.125)
NetQ3_1: Q3.1 R14.1 R20.2 | length 4.6
  Top Layer w0.508: Q3.1@15.45,11.15 16.675,11.15 R20.2@17.05,11.525 R14.1@17.05,13.075 ; Q3.1@15.838,11.15 ccw(c15.838,12.737) R20.2@16.96,11.615
NetQ4_1: Q4.1 R15.1 R21.2 | length 5.3
  Top Layer w0.508: R21.2@15,51.875 Q4.1@16.775,51.875 ; 16.387,51.875 cw(c16.387,51.437) Q4.1@16.697,51.747 ; Q4.1@16.8,51.85 16.8,51.275 R15.1@17.8,50.275 ; Q4.1@16.946,51.75 ccw(c18.445,51.75) 17.385,50.69